# Altium PCB PCB1.PcbDoc (part 2 of 4)
Units mm, origin at the board's own origin, x right, y up, seen from the top; angles counter-clockwise.
Board outline 200 x 55 mm, 4 copper layers (Top Layer, Power Layer, GND Layer, Bottom Layer), stack 1.714 mm thick; 404 components, 268 nets, 1339 pads, 777 vias.
Unrouted connection lines stored in the file: 18.
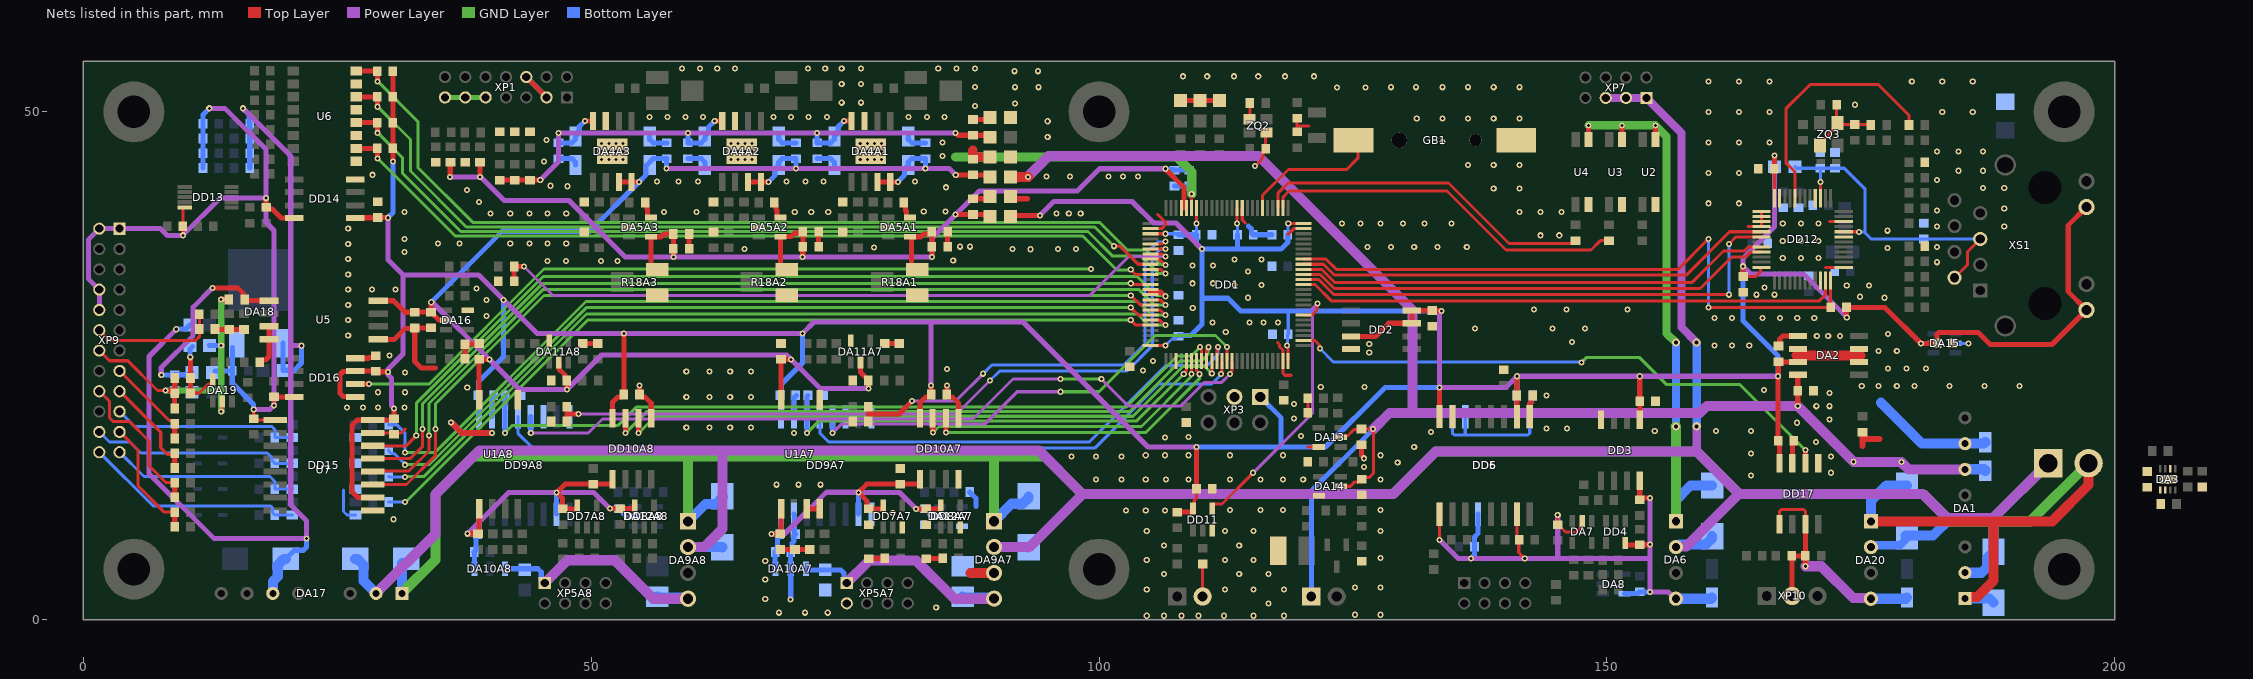
[diagram p4: the nets of this part, all layers, seen from the top]

## Via types
v1: diameter 0.6, hole 0.3, Top Layer to Bottom Layer, tented both sides, 735 vias
v2: diameter 0.6, hole 0.3, Top Layer to Bottom Layer, 36 vias
v3: diameter 0.8, hole 0.4, Top Layer to Bottom Layer, tented both sides, 4 vias
v4: diameter 0.2, hole 0.1, Top Layer to Bottom Layer, 2 vias

## Nets (pads, with @x,y where several pads share a name; then routed paths per layer and width w, separated by ;. In a path a pad name is that pad's centre, name@x,y a point inside that pad or via, vN(x,y) a via of type N, cw(c..) or ccw(c..) an arc to the next point about the centre after c; other vN are vias at no path point) (continued)
+3.3V: C8.1 C11.1 C13.2 C14.2 C15.2 C20.1 C21.1 C27.1 C38.1 C42.1 C43.1 C56A7.1 C56A8.1 C68A7.1 C68A8.1 C77.1 C80.1 C85.1 C90.1 C105.1 C106.1 C108.1 C123.1 DA2.2 DA2.3 DA2.6 DA2.7 DA15.5 DD1.11 DD1.19 DD1.28 DD1.50 DD1.75 DD1.100 DD2.3 DD2.7 DD2.8 DD3.1 DD5.10 DD5.16 DD6.7 DD9A7.1 DD9A8.1 DD10A7.8 DD10A8.8 DD11.5 DD12.24 DD12.36 DD14.1 DD15.10 DD15.16 DD16.1 DD16.3 DD17.8 L2.1 L6.1 R22.1 R56.2 R71.2 R91.1 R92.1 R94.1 R96.1 XP3.1 XS1.9 XS1.11 | length 489
  Top Layer w0.3: DD1.50@105.075,27 v1(106.525,27) ; DD1.28@105.075,38 v1(106.525,38) ; DD11.5@109.125,10.6 109.25,10.725 DD11.5@109.25,10.95 109.375,11.075 109.375,11.75 109.6,11.975 C77.1@109.6,12.9 ; v1(109.6,39.025) DD1.19@109.6,40.525 ; v1(113.6,39.025) DD1.11@113.6,40.525 ; v1(118.5,27) 118.5,26.919 118.6,26.819 DD1.75@118.6,25.475 ; v1(118.625,39) DD1.100@120.125,39 ; C90.1@163.4,33.8 164.644,33.8 165.12,34.276 165.12,34.7 DD12.36@165.2,34.7 ; C85.1@166.475,44.425 C85.1@166.45,44.4 166.5,44.35 DD12.24@166.5,41.5 ; v1@166.475,45.675 v1(166.5,45.7)
  Top Layer w0.5: DD16.1@26.8,21.95 26.75,22 25.593,22 25.3,22.293 25.3,24.157 25.593,24.45 26.75,24.45 DD16.3@26.8,24.5 26.825,24.475 C108.1@28.775,24.475 ; DD14.1@26.8,39.55 26.825,39.575 28.975,39.575 28.987,39.588 30.013,39.588 v1(30.025,39.575) ; DD15.16@28.485,19.685 28.468,19.667 26.992,19.667 26.48,19.155 26.48,12.61 27.04,12.05 DD15.10@28.5,12.05 ; DD15.16@28.5,19.67 30.47,19.67 C106.1@30.6,19.8 v1(30.6,20.8) ; C108.1@28.825,24.425 28.831,24.419 29.981,24.419 v1(30,24.4) ; v1(30.5,45.1) R96.1@30.5,46.4 R92.1@30.5,51.5 R91.1@30.5,54 ; DD10A8.8@52.125,19.85 52.125,21.429 52.646,21.95 53.05,21.95 53.225,22.125 C68A8.1@53.225,22.175 v1(53.225,28.2) ; DD10A7.8@82.375,19.85 82.375,21.369 82.956,21.95 83.3,21.95 83.475,22.125 C68A7.1@83.475,22.175 v1(83.475,23.05) ; L2.1@91.275,39.7 91.376,39.801 v1(94.174,39.801) ; R56.2@107.7,10.6 DD11.5@109.125,10.6 ; C77.1@109.6,12.9 v1(109.6,17) ; DD2.3@124.796,27.896 127.221,27.896 128.521,29.196 DD2.7@130.796,29.196 DD2.8@130.796,30.446 C27.1@132.796,30.446 132.818,30.423 133.702,30.423 v1(133.725,30.4) ; DD5.16@133.506,20.01 v1(133.506,22.85) ; DD5.10@141.126,20.01 C43.1@141.126,21.838 ; C43.1@141.15,21.786 v1(141.15,23.975) ; C38.1@153.225,21.5 v1(153.225,23.975) ; DD3.1@153.231,19.7 C38.1@153.231,21.55 ; C90.1@163.4,33.8 v1(163.4,34.8) ; C85.1@166.475,44.425 v1@166.475,45.675 ; DD17.8@166.989,15.4 166.989,17.486 C123.1@166.85,17.625 v1(166.85,23.975) 166.862,23.987 166.862,25.387 C8.1@166.875,25.4 166.887,25.388 DA2.3@168.788,25.388 ; DA2.3@168.8,25.375 DA2.3@168.788,25.388 ; DA2.3@168.825,25.425 DA2.3@168.788,25.388 ; v1(173.6,29.775) 173.587,29.788 173.587,30.738 R71.2@173.575,30.75 177.35,30.75 v1(180.9,27.2) 182.475,27.2 C80.1@182.5,27.225 182.5,28.124 182.676,28.3 186.512,28.3 187.712,27.1 193.8,27.1 XS1.9@197.2,30.5 195.4,32.3 195.4,38.83 XS1.11@197.2,40.63
  Top Layer w1: 168.675,26.025 168.8,26.025 174.8,26.025 174.926,26.025
  Power Layer w0.5: 30.025,35.432 31.499,33.958 ; 30.025,35.482 v1(30.025,39.575) ; v1(30.6,20.8) 30.6,20.827 30.344,21.083 30.344,23.8 30.019,24.125 30.019,24.381 v1(30,24.4) 30.019,24.419 30.019,24.675 31.499,26.155 31.499,33.958 ; v1(70.825,28.2) v1(53.225,28.2) 44.675,28.2 v1(41.375,31.5) 41.356,31.519 38.917,33.958 31.499,33.958 ; v1@70.844,28.219 71.943,29.318 83.475,29.318 ; v1(83.475,23.05) 83.475,29.318 ; v1(94.174,39.801) 95.55,41.176 103.249,41.176 ; 103.275,41.176 103.249,41.176 ; v1(109.6,17) 104.825,17 92.507,29.318 83.475,29.318 ; v1(110.125,36.5) 107.575,39.05 105.375,39.05 103.249,41.176 ; v1(133.506,22.85) 140.025,22.85 v1@141.131,23.956 ; v1@133.506,22.877 133.506,30.154 133.725,30.373 v1(133.725,30.4) ; v1(141.15,23.975) v1(153.225,23.975) v1(166.85,23.975) ; v1(166.5,45.7) 166.5,38.711 163.4,35.611 v1(163.4,34.8) 164.145,34.055 169.32,34.055 v1(173.6,29.775)
  Bottom Layer w0.3: v1(106.525,27) 107.175,27.65 107.5,27.65 C15.2@107.825,27.975 ; v1(106.525,38) 107.725,38 C14.2@107.825,37.9 ; C11.1@109.575,37.9 109.587,37.912 109.587,39.013 v1(109.6,39.025) ; v1(113.6,39.025) 113.612,39.013 C13.2@113.612,37.9 ; v1(118.5,27) 118.557,27.057 118.557,28.032 C21.1@118.625,28.1 118.625,30.4 ; C20.1@118.575,37.9 118.6,37.925 118.6,38.975 v1(118.625,39) ; L6.1@166.5,44.6 v1(166.5,45.7) ; v1(180.9,27.2) 180.912,27.212 182.137,27.212 DA15.5@182.15,27.225
  Bottom Layer w0.5: v1(30.025,39.575) 30.025,39.602 30.5,40.077 v1(30.5,45.1) ; DD9A8.1@38.99,20.209 38.99,21.967 38.943,22.014 38.943,23.459 41.375,25.891 v1(41.375,31.5) ; C56A7.1@68.64,22.165 68.75,22.275 68.75,23.209 70.825,25.284 v1(70.825,28.2) ; DD9A7.1@68.705,20.2 C56A7.1@68.705,22.1 ; C15.2@107.825,27.975 109.025,27.975 110.125,29.075 110.125,31.654 ; C14.2@107.825,37.9 C11.1@109.575,37.9 109.575,37.05 v1(110.125,36.5) ; v1(109.6,17) 117.925,17 ; C13.2@113.625,37.9 113.625,36.5 ; XP3.1@115.865,21.94 117.925,19.88 117.925,17 ; C20.1@118.575,37.9 118.575,37.15 117.925,36.5 113.625,36.5 ; v1(133.506,22.85) 128.15,22.85 122.3,17 117.925,17 ; v1(133.725,30.4) 118.625,30.4 113.95,30.4 112.696,31.654 110.125,31.654 ; DD6.7@141.108,20.01 C42.1@141.108,22.052 ; C42.1@141.15,21.868 v1(141.15,23.975) ; v1(163.4,34.8) 163.4,29.425 166.85,25.975 v1(166.85,23.975) ; 110.125,31.654 v1(110.125,36.5) ; v1(110.125,36.5) 113.625,36.5
+3.3VA: C10.1 C12.2 C17.2 C35A1.1 C35A2.1 C35A3.1 C36A1.1 C36A2.1 C36A3.1 DA5A1.4 DA5A2.4 DA5A3.4 DD1.21 DD1.22 L2.2 R18A1.3 R18A2.3 R18A3.3 R19A4.1 R19A5.1 | length 116.3
  Top Layer w0.3: DD1.22@108.1,40.525 108.35,40.525 DD1.21@108.6,40.525
  Top Layer w0.5: v1(36.125,43.593) 36.144,43.612 36.144,44.994 R19A5.1@36.175,45.025 ; v1(39.073,43.59) R19A4.1@39.073,45.018 ; R18A3.3@56.525,34.475 56.3,34.475 55.9,34.875 DA5A3.4@55.9,37.7 56.892,37.7 57.172,37.98 C35A3.1@58.1,37.98 ; v1@58.1,35.895 C36A3.1@58.1,36.525 ; C36A3.1@58.1,36.33 C35A3.1@58.1,37.7 ; DA5A2.4@68.65,37.7 68.65,34.775 R18A2.3@68.95,34.475 ; DA5A2.4@68.8,37.7 68.825,37.725 69.717,37.725 70.043,38.051 70.696,38.051 C35A2.1@70.85,38.205 C36A2.1@70.85,36.705 70.838,36.692 70.838,35.713 v1(70.825,35.7) ; R18A1.3@82.1,34.475 81.95,34.475 81.55,34.875 81.55,37.7 81.554,37.704 82.482,37.704 82.757,37.98 83.375,37.98 83.55,38.155 C35A1.1@83.55,38.205 ; v1(83.55,35.7) C36A1.1@83.55,36.705 C35A1.1@83.55,37.98 ; v1(85.875,39.9) C10.1@87.6,39.9 ; C10.1@87.625,39.9 89.075,39.9 L2.2@89.275,39.7 ; v1@106.544,44.381 108.35,42.575 108.35,40.525
  Power Layer w0.5: v1(36.125,43.593) v1@39.119,43.593 ; v1@39.146,43.593 v1@39.119,43.593 ; v1(106.525,44.4) 100.05,44.4 97.875,42.225 88.225,42.225 83.55,37.55 v1(83.55,35.7) v1(70.825,35.7) v1(58.1,35.7) 53.399,35.7 47.824,41.275 41.463,41.275 39.167,43.571 39.119,43.571 v1@39.119,43.593
  Bottom Layer w0.5: v1@36.125,43.566 v1(36.125,43.593) ; v1(106.525,44.4) 106.582,44.343 107.332,44.343 C17.2@107.425,44.25 ; C17.2@107.433,44.258 C12.2@108.841,44.258
+3.3VA_ETH: C78.1 C89.1 C92.1 DD12.8 DD12.15 L6.2 XS1.2 XS1.5 | length 33.6
  Top Layer w0.3: DD12.15@171,41.5 v1(171,43.1) ; DD12.8@173.3,38.2 174.797,38.2 v1(174.816,38.182) ; XS1.2@184.2,33.677 185.5,34.977 185.5,36.247 XS1.5@186.74,37.487
  Bottom Layer w0.3: L6.2@168.5,44.6 168.65,44.45 C89.1@170.975,44.45 ; v1(171,43.1) 171,44.425 C89.1@170.975,44.45 ; v1(174.816,38.182) 175.382,38.182 ; XS1.5@186.74,37.487 C78.1@181.179,37.487 176.013,37.487 175.382,38.118 175.382,42.433 173.365,44.45 C92.1@172.442,44.45 C89.1@170.975,44.45
+5V: C2.1 C4.2 C5.1 C73.1 C74.1 DA1.6 DA2.4 DA3.1 DA3.6 DA13.2 DA14.2 L1.1 XP6.1 | length 155.5
  Top Layer w0.3: DA13.2@123.937,18.085 123.941,18.088 124.46,18.088 125.088,18.716 125.764,18.716 C73.1@125.837,18.788 125.849,18.776 126.974,18.776 v1(126.987,18.763) ; DA14.2@123.95,13.15 124.755,13.15 125.184,13.579 125.579,13.579 C74.1@125.85,13.85 ; C74.1@125.85,13.9 125.85,14.007 126.607,14.007 127,14.4 v1@127,18.763 ; C4.2@168.775,22.55 168.775,24.1 DA2.4@168.8,24.125
  Top Layer w0.5: v1(168.775,21.05) DA2.4@168.775,24.1
  Top Layer w1: L1.1@91.275,43.6 v1(93,43.6)
  Power Layer w1: v1(93,43.6) 95.058,45.658 115.692,45.658 130.85,30.5 130.85,20.35 ; v1@126.993,18.757 128.587,20.35 130.85,20.35 ; v1(174.27,15.56) 168.78,21.05 159.83,21.05 159.13,20.35 130.85,20.35 ; v1@174.305,15.525 v1(178.975,15.525) 179.7,14.8 DA1.6@185.169,14.8
  Bottom Layer w0.5: XP6.1@120.896,2.3 120.896,12.673 v1(126.987,18.763)
  Bottom Layer w1: DA1.6@185.25,14.82 187.125,14.82 187.225,14.72 C2.1@187.225,14.675
+5V_DRVA7: C54A7.1 C58A7.1 C59A7.1 C63A7.1 C64A7.1 C67A7.1 C70A7.1 DA10A7.1 DA12A7.2 DD7A7.5 DD8A7.5 DD9A7.10 DD9A7.16 DD10A7.1 U1A7.1 | length 44
  Top Layer w0.5: v1(67.775,8.45) 67.787,8.463 68.587,8.463 C54A7.1@68.6,8.475 ; C54A7.1@68.625,8.475 68.7,8.55 U1A7.1@68.7,10.925 ; v1(76.325,12.538) 77.137,13.35 C63A7.1@80.425,13.35 82.325,13.35 82.375,13.4 DD10A7.1@82.375,13.85 ; v1@76.344,12.519 77.151,11.712 77.151,11.099 C58A7.1@77.325,10.925 ; C58A7.1@77.55,10.925 78.725,10.925 78.75,10.95 DD7A7.5@78.75,11.25 ; v1(81.975,10.925) C59A7.1@83,10.925 84.4,10.925 84.425,10.95 DD8A7.5@84.425,11.25
  Power Layer w0.5: v1(67.775,8.45) 69.05,8.45 73.157,12.557 v1@76.279,12.557 ; v1(76.325,12.538) 80.362,12.538 v1(81.975,10.925)
  Bottom Layer w0.3: C70A7.1@83,10.925 83.196,10.729 83.196,10.351 83.372,10.175 DA12A7.2@84.475,10.175
  Bottom Layer w0.5: v1(67.775,8.45) 67.787,8.438 68.562,8.438 C64A7.1@68.575,8.425 ; C67A7.1@68.12,6.62 68.12,5.028 DA10A7.1@68.145,5.003 ; C67A7.1@68.125,6.675 68.3,6.85 68.3,7.157 68.336,7.193 68.336,7.907 68.4,7.971 C64A7.1@68.4,8.2 ; C64A7.1@68.705,8.505 DD9A7.16@68.705,10.6 ; DD9A7.10@76.325,10.4 76.325,12.199 ; v1(81.975,10.925) C70A7.1@83,10.925
+5V_DRVA8: C54A8.1 C58A8.1 C59A8.1 C63A8.1 C64A8.1 C67A8.1 C70A8.1 DA10A8.1 DA12A8.2 DD7A8.5 DD8A8.5 DD9A8.10 DD9A8.16 DD10A8.1 U1A8.1 | length 44.2
  Top Layer w0.5: v1(37.835,8.475) C54A8.1@38.875,8.475 38.985,8.585 U1A8.1@38.985,10.925 ; DD7A8.5@48.65,11.25 48.65,10.95 48.625,10.925 47.175,10.925 47.175,11.978 v1(46.615,12.538) 47.426,13.35 C63A8.1@50.225,13.35 52.075,13.35 52.125,13.4 DD10A8.1@52.125,13.85 ; v1(51.85,10.95) C59A8.1@52.875,10.95 54.275,10.95 54.3,10.975 DD8A8.5@54.3,11.25
  Power Layer w0.5: v1(37.835,8.475) 41.898,12.538 v1(46.615,12.538) 50.262,12.538 v1(51.85,10.95)
  Bottom Layer w0.3: C70A8.1@52.725,10.95 52.775,10.95 53.05,10.675 53.05,10.45 53.325,10.175 DA12A8.2@54.35,10.175
  Bottom Layer w0.5: v1(37.835,8.475) 38.915,8.475 38.99,8.55 DD9A8.16@38.99,10.4 ; C67A8.1@38.5,6.675 38.675,6.85 38.675,7.193 38.675,8.25 C64A8.1@38.85,8.425 ; DA10A8.1@38.525,5.025 C67A8.1@38.525,6.65 ; DD9A8.10@46.61,10.4 46.612,10.402 46.612,12.536 v1(46.615,12.538) ; v1(51.85,10.95) C70A8.1@52.725,10.95
+5V_FS: C120.1 C121.1 C122.1 DA20.4 DD17.1 DD17.3 XP10.2 | length 26.2
  Top Layer w0.3: DD17.1@166.989,9.4 166.99,10.685 167.166,10.861 169.363,10.861 169.539,10.685 DD17.3@169.539,9.4
  Top Layer w0.5: XP10.2@168.225,2.35 168.2,2.375 168.2,6.275 C120.1@168.175,6.3 C121.1@169.525,6.3 ; C121.1@169.539,6.311 DD17.3@169.539,9.4
  Top Layer w0.6: v1(169.525,5.275) 169.525,6.297 C121.1@169.539,6.311
  Power Layer w1: v1(169.525,5.275) 171.1,5.275 174.223,2.152 175.898,2.152 DA20.4@175.975,2.075
  Bottom Layer w0.6: DA20.4@175.899,2.151 DA20.4@175.975,2.075
  Bottom Layer w1: DA20.4@175.975,2.075 179.4,2.075 C122.1@179.525,2.2
+5V_HW: C95.1 C100.1 C101.1 C112.1 C113.1 DA18.3 DD13.10 DD14.8 DD15.1 DD16.8 L7.1 R109.2 R110.2 R111.2 R112.2 XP9.1 XP9.2 XP9.8 XP9.10 | length 89.2
  Top Layer w0.3: v1(9.825,37.85) C95.1@9.825,38.75 9.825,40.55 9.875,40.6 DD13.10@10,40.6 ; C101.1@16.8,19.8 v1(16.8,20.7) ; C101.1@17.1,19.695 17.125,19.67 DD15.1@18.8,19.67 ; v1(18.8,21.1) C112.1@18.8,21.95
  Top Layer w0.5: v1(18,41.5) 18.013,41.487 18.013,40.612 C100.1@18.025,40.6 18.2,40.425 18.637,40.425 19.525,39.536 20.786,39.536 DD14.8@20.8,39.55 ; C112.1@18.8,21.95 DD16.8@20.8,21.95
  Power Layer w0.5: XP9.10@1.6,30.5 XP9.8@1.6,32.5 0.518,33.582 0.518,37.418 XP9.2@1.6,38.5 XP9.1@3.6,38.5 7.625,38.5 8.294,37.831 v1@9.779,37.831 ; v1(9.825,37.85) 13.475,41.5 v1(18,41.5) ; v1(12.425,50.35) 13.956,50.35 18,46.306 v1(18,41.5) ; v1(16.8,20.7) 18.373,20.7 18.773,21.1 v1(18.8,21.1) ; v1@18.8,21.127 18.8,38.325 18,39.125 v1(18,41.5)
  Bottom Layer w0.5: R109.2@11.809,44.475 R110.2@11.809,45.925 R112.2@11.809,48.825 ; R112.2@11.825,48.8 11.825,49.75 v1(12.425,50.35) ; L7.1@13,24.5 C113.1@14.7,24.5 ; DA18.3@14.7,26.804 C113.1@14.7,24.5 ; v1@16.767,20.733 16.781,20.746 16.781,21.194 14.7,23.275 C113.1@14.7,24.5
+5V_PS: C40.1 C41.1 C45.1 C46.1 C47.1 C48.1 C49.1 DA6.4 DA7.2 DA8.5 DD3.8 DD4.5 DD5.1 DD5.7 DD6.13 | length 66
  Top Layer w0.3: v1@133.456,7.875 v1(133.506,7.875) DD5.1@133.506,10.41 ; DD5.7@141.126,10.41 141.126,8.13 C47.1@141.356,7.9 ; C47.1@141.356,7.875 141.313,7.875 141.313,6.619 v1(141.906,6.025) ; v1(145.15,10.325) C46.1@145.15,9.375 145.2,9.375 145.925,8.65 146.164,8.65 ; 146.114,8.65 146.164,8.65 ; DA7.2@147.55,9.725 147.425,9.6 147.425,9.051 147.024,8.65 146.164,8.65
  Top Layer w0.5: DD4.5@151.8,7.575 151.8,7.4 151.825,7.375 C45.1@153.225,7.375 153.238,7.388 154.237,7.388 v1(154.25,7.4) ; C40.1@153.225,11.85 C40.1@153.225,11.975 ; DD3.8@153.225,13.7 C40.1@153.225,11.975 ; v1(154.25,11.975) C40.1@153.225,11.975
  Power Layer w0.5: v1(133.506,7.875) 135.356,6.025 v1(136.606,6.025) v1(141.906,6.025) 145.15,6.025 ; v1@145.15,10.298 145.15,6.025 ; v1(154.25,11.975) v1(154.25,7.4) 154.25,6.025 ; DA6.4@156.781,2.08 156.709,2.08 156.039,2.75 v1(154.25,2.75) 154.25,6.025 ; 145.15,6.025 154.25,6.025
  Bottom Layer w0.5: v1(136.606,6.025) 136.956,6.375 C48.1@136.956,7.2 136.956,8.15 137.316,8.51 DD6.13@137.316,10.4 DD6.13@137.316,10.41 ; DA8.5@151.725,2.575 153,2.575 153.175,2.75 C49.1@153.225,2.75 v1(154.25,2.75)
  Bottom Layer w1: DA6.4@156.781,2.08 160.25,2.08 160.35,2.18 C41.1@160.35,2.2
+5VA: C3.1 C31A1.1 C31A2.1 C31A3.1 C32A1.1 C32A2.1 C32A3.1 C60A7.1 C60A8.1 C65A7.1 C65A8.1 C102.1 C104.1 DA4A1.7 DA4A1.8 DA4A2.7 DA4A2.8 DA4A3.7 DA4A3.8 DA11A7.2 DA11A8.2 DA16.2 L1.2 U1A7.8 U1A8.8 U5.8 | length 152.2
  Top Layer w0.5: U5.8@29.05,31.425 29.067,31.408 30.567,31.408 31.7,30.275 C102.1@32.65,30.275 32.654,30.279 34.246,30.279 C104.1@34.25,30.282 ; C104.1@34.263,30.295 34.263,31.245 v1(34.275,31.257) ; C104.1@34.3,30.282 34.475,30.107 34.475,30.057 35,29.532 35.7,29.532 DA16.2@35.725,29.507 ; U1A8.8@38.985,21.675 C60A8.1@38.985,25.625 ; C60A8.1@38.998,25.638 39.004,25.631 39.994,25.631 v1(40,25.625) ; DA11A8.2@46.825,25.325 46.85,25.3 46.85,24.675 47.45,24.075 47.45,23.725 C65A8.1@47.625,23.55 v1(47.625,22.675) ; DA4A3.7@52.75,43.105 DA4A3.8@54,43.105 54.005,43.1 v1(54.725,43.1) ; DA4A2.7@65.466,43.105 65.471,43.1 v1(67.475,43.1) ; U1A7.8@68.7,21.675 68.7,25.6 68.75,25.65 68.762,25.638 69.688,25.638 v1(69.7,25.625) ; DA11A7.2@76.525,25.325 76.525,24.375 C65A7.1@77.262,23.638 ; v1(77.3,22.775) C65A7.1@77.3,23.55 ; DA4A1.7@78.2,43.105 78.205,43.1 v1(80.2,43.1) ; v1(85.9,43.8) 89.075,43.8 L1.2@89.275,43.6
  Power Layer w0.5: v1(34.275,31.257) 34.294,31.238 34.387,31.238 v1@39.981,25.644 ; v1(40,25.625) 42.95,22.675 v1(47.625,22.675) 51.025,26.075 69.25,26.075 v1(69.7,25.625) 72.55,22.775 v1@77.273,22.775 ; v1@57.675,44.425 v1(70.175,44.425) 85.248,44.425 85.873,43.8 v1(85.9,43.8)
  Bottom Layer w0.5: v1(34.275,31.257) 41.262,38.244 49.869,38.244 v1(54.725,43.1) 55.425,43.8 55.425,44.7 56.125,45.4 C31A3.1@57.45,45.4 57.437,45.387 57.437,44.438 v1(57.425,44.425) ; v1@67.494,43.119 68.125,43.75 68.125,44.425 C32A2.1@68.475,44.775 68.475,45.05 68.825,45.4 C31A2.1@70.175,45.4 v1(70.175,44.425) ; v1@80.219,43.119 80.875,43.775 80.875,44.425 C32A1.1@81.225,44.775 81.225,45.05 81.575,45.4 C31A1.1@82.925,45.4 82.912,45.387 82.912,44.438 v1(82.9,44.425)
+5VA_HW: C97.1 C117.1 L7.2 U5.1 | length 20.1
  Top Layer w0.5: v1(12.75,32.675) 15.233,32.675 15.725,32.183 15.725,31.7 16,31.425 U5.1@18.3,31.425
  Power Layer w0.5: v1(7.7,24.1) 7.7,24.832 10.841,27.973 10.841,30.766 v1(12.75,32.675)
  Bottom Layer w0.5: v1(7.7,24.1) 7.703,24.097 C117.1@9.032,24.097 ; C117.1@9.032,24.12 10.512,24.12 L7.2@10.717,24.325
+12V_DRVA7: C57A7.1 C62A7.2 DA9A7.4 DA10A7.3 XP5A7.1 | length 25.2
  Top Layer w1: DA9A7.4@89.665,2.075 DA9A7.4@89.675,2.085
  Power Layer w1: XP5A7.1@75.185,3.653 77.357,5.825 82.023,5.825 85.773,2.075 DA9A7.4@89.7,2.075
  Bottom Layer w0.5: DA10A7.3@71.145,5.003 71.145,4.947 71.18,4.912 C62A7.2@73.045,4.912 ; C62A7.2@73.053,4.903 74.589,4.903 74.882,4.611 74.882,3.956 XP5A7.1@75.185,3.653
  Bottom Layer w1: C57A7.1@86.575,2.275 86.675,2.175 89.6,2.175 DA9A7.4@89.7,2.075
+12V_DRVA8: C57A8.1 C62A8.2 DA9A8.4 DA10A8.3 XP5A8.1 | length 24.6
  Power Layer w1: XP5A8.1@45.45,3.625 47.688,5.863 52.336,5.863 56.125,2.075 DA9A8.4@59.55,2.075
  Bottom Layer w0.5: DA10A8.3@41.525,5.025 44.758,5.025 45.1,4.683 45.1,3.975 XP5A8.1@45.45,3.625
  Bottom Layer w1: C57A8.1@56.525,2.275 56.625,2.175 59.45,2.175 DA9A8.4@59.55,2.075
+24V: C1.1 C39.1 C51A7.1 C51A8.1 C110.1 C119.1 DA1.2 DA6.2 DA9A7.2 DA9A8.2 DA17.2 DA20.2 XP2.1 XP7.1 XP7.3 XP7.5 | length 296.9
  Power Layer w0.8: XP7.5@149.875,51.375 XP7.3@151.875,51.375 XP7.1@153.875,51.375 157.324,47.926 157.324,28.801 v3(158.825,27.3) ; 158.831,16.569 v3(158.831,19.05)
  Power Layer w1: DA17.2@28.84,2.6 34.675,8.435 34.675,12.333 39.025,16.683 62.925,16.683 ; DA9A8.2@59.55,7.155 61.155,7.155 62.925,8.925 62.925,16.683 ; DA9A7.2@89.7,7.155 93.157,7.155 98.376,12.374 ; DA6.2@156.781,7.16 156.848,7.226 157.826,7.226 163,12.4 ; XP2.1@193.44,15.425 188.05,10.035 183.432,10.035 181.067,12.4 163,12.4 ; 62.925,16.683 94.067,16.683 98.376,12.374 ; 98.376,12.374 128.939,12.374 133.134,16.569 158.831,16.569 163,12.4
  Bottom Layer w0.8: v3(158.831,19.05) v3@158.831,27.3 ; DA20.2@175.975,7.155 176.09,7.27 176.514,7.27 176.582,7.337 178.825,7.337 179.525,8.037 C119.1@179.525,8.225
  Bottom Layer w1: C110.1@26.8,6 27,6 27.6,5.4 27.6,3.84 DA17.2@28.783,2.657 ; DA9A8.2@59.55,7.155 59.552,7.153 62.923,7.153 C51A8.1@62.925,7.15 ; DA9A7.2@89.675,7.165 89.682,7.158 93.067,7.158 C51A7.1@93.075,7.15 ; DA6.2@156.781,7.16 156.89,7.16 157.15,7.42 159.164,7.42 159.169,7.425 159.75,7.425 160.35,8.025 C39.1@160.35,8.225 ; C119.1@179.395,8.295 182.095,8.295 183.835,10.035 188.05,10.035 ; DA1.2@185.25,4.64 186.864,4.64 187.45,5.226 187.45,6.1 C1.1@188.05,6.7 188.05,10.035 ; XP2.1@193.44,15.425 188.05,10.035
+24V_HW: C111.2 C114.1 DA17.6 DA18.1 L8.1 R105.2 R106.2 R107.2 R108.2 | length 101.1
  Power Layer w0.5: v1(9.175,28.6) 6.5,25.925 6.5,14.391 12.903,7.988 v1(22,7.988) 22,9.741 20.442,11.298 20.442,26.994 ; v1(15.75,50.35) 20.442,45.658 20.442,26.994 ; v1@21.481,26.994 20.442,26.994
  Bottom Layer w0.5: v1(9.175,28.6) 9.202,28.6 9.232,28.63 10.133,28.63 L8.1@10.518,29.015 ; v1(15.75,50.35) 15.75,50.323 16.348,49.725 16.348,48.886 R108.2@16.409,48.825 ; R105.2@16.409,44.475 R106.2@16.409,45.925 R107.2@16.409,47.375 R108.2@16.409,48.825 ; R108.2@16.409,48.875 R108.2@16.409,48.825 ; DA18.1@19.7,27.229 C111.2@19.7,24.535 19.732,24.567 20.792,24.567 21.5,25.275 v1(21.5,26.975) ; C114.1@19.959,6 20.804,6.845 21.707,6.845 22,7.138 v1(22,7.988)
  Bottom Layer w1: DA17.6@18.68,2.6 18.68,3.78 19.169,4.269 19.169,5.4 19.769,6 C114.1@19.959,6
+24VA_HW: C116.1 C118.1 DA19.5 L8.2 | length 7.7
  Top Layer w0.3: v1(10.55,25.85) v1@10.558,25.842 ; C116.1@10.575,22.3 C116.1@10.575,22.3 11.408,22.3 12.308,23.2 12.633,23.2 12.758,23.325 DA19.5@12.758,23.65
  Top Layer w0.5: C118.1@10.558,23.823 v1@10.558,25.842 ; C116.1@10.575,22.3 C118.1@10.574,23.864
  Bottom Layer w0.5: v1(10.55,25.85) 10.534,25.866 10.534,26.67 L8.2@10.753,26.888
+VBAT: DD1.6 GB1.2 | length 13.9
  Top Layer w0.3: DD1.6@116.1,40.525 116.1,41.777 118.648,44.325 124.375,44.325 125.475,45.425 GB1.2@125.475,47.2
-5VA: C18.1 C29A1.2 C29A2.2 C29A3.2 C30A1.1 C30A2.1 C30A3.1 DA4A1.4 DA4A2.4 DA4A3.4 L3.2 R12A1.1 R12A2.1 R12A3.1 | length 69.2
  Top Layer w0.5: R12A1.1@41,43.3 42.525,43.3 44.05,43.3 v1(45,43.3) ; v1(49.425,49.1) 50.195,49.1 DA4A3.4@50.2,49.105 ; v1(62.175,49.1) 62.911,49.1 DA4A2.4@62.916,49.105 ; v1(74.9,49.1) 75.645,49.1 DA4A1.4@75.65,49.105 ; v1(85.875,47.925) 85.902,47.925 86.127,47.7 89.1,47.7 L3.2@89.25,47.55
  Power Layer w0.5: v1(45,43.3) 46.8,45.1 v1(46.8,47.925) v1(59.525,47.925) v1(72.25,47.925) ; v1@72.277,47.925 v1(85.875,47.925)
  Bottom Layer w0.5: v1(46.8,47.925) C30A3.1@46.8,46.95 48.125,46.95 48.475,47.3 C29A3.2@48.475,47.575 48.825,47.925 48.825,48.531 49.375,49.081 49.406,49.081 v1(49.425,49.1) ; v1(59.525,47.925) C30A2.1@59.525,46.95 60.85,46.95 61.2,47.3 C29A2.2@61.2,47.575 61.55,47.925 61.55,48.475 v1@62.156,49.081 ; v1(72.25,47.925) C30A1.1@72.25,46.95 73.6,46.95 73.95,47.3 C29A1.2@73.95,47.575 74.3,47.925 74.3,48.5 v1@74.881,49.081
ACTn: DD12.20 R63.2 | length 24.5
  Top Layer w0.3: DD12.20@168.5,41.5 168.5,44.1 167.6,45 167.6,50.3 170,52.7 176.7,52.7 179.725,49.675 R63.2@179.725,48.712
AGND: C3.2 C10.2 C12.1 C17.1 C18.2 C29A1.1 C29A2.1 C29A3.1 C30A1.2 C30A2.2 C30A3.2 C31A1.2 C31A2.2 C31A3.2 C32A1.2 C32A2.2 C32A3.2 C33A1.2 C33A2.2 C33A3.2 C34A1.2 C34A2.2 C34A3.2 C35A1.2 C35A2.2 C35A3.2 C36A1.2 C36A2.2 C36A3.2 C37A4.2 C37A5.2 C60A7.2 C60A8.2 C61A7.2 C61A8.2 C65A7.2 C65A8.2 C71A7.2 C71A8.2 C102.2 C103.2 C104.2 C109.2 DA4A1.3 DA4A1.EPAD DA4A2.3 DA4A2.EPAD DA4A3.3 DA4A3.EPAD DA5A1.2 DA5A1.6 DA5A2.2 DA5A2.6 DA5A3.2 DA5A3.6 DA11A7.5 DA11A8.5 DA16.5 DD1.20 R1.2 R2.2 R5.2 R13A1.2 R13A2.2 R13A3.2 R15A1.2 R15A2.2 R15A3.2 R18A1.1 R18A2.1 R18A3.1 R40A7.2 R40A8.2 R97.2 U1A7.5 U1A8.5 U5.5 XP1.3 XP1.6 XP1.9 XP1.11 XP1.13 | length 92
  Top Layer w0.3: DD1.20@109.1,40.525 109.1,41.875 v1(109.125,41.9)
  Top Layer w0.5: U5.5@29.05,27.6 30.625,27.6 31.72,28.695 32.62,28.695 C102.2@32.65,28.725 ; C104.2@34.25,28.725 C102.2@32.65,28.725 ; 34.666,24.8 33.275,24.8 32.65,25.425 C102.2@32.65,28.725 ; C103.2@37.604,25.679 C103.2@37.6,25.682 R97.2@37.6,27.132 37.628,27.16 38.963,27.16 C60A8.2@38.994,27.191 ; XP1.6@43.625,53.425 XP1.3@45.625,51.425 ; R40A8.2@49.2,27.2 C61A8.2@50.65,27.2 ; C34A3.2@55.325,41.025 55.5,40.85 55.5,40.425 55.55,40.375 55.55,39.625 55.575,39.6 DA5A3.6@55.9,39.6 ; C36A3.2@59.65,36.525 C35A3.2@59.65,37.98 ; C34A2.2@68.05,41.075 68.225,40.9 68.225,40.425 68.325,40.325 68.325,39.625 68.35,39.6 DA5A2.6@68.65,39.6 ; C36A2.2@72.4,36.705 C35A2.2@72.4,38.205 ; R40A7.2@78.9,27.2 C61A7.2@80.35,27.2 ; C34A1.2@80.775,41.075 80.95,40.9 80.95,40.297 81.05,40.197 81.05,39.625 81.075,39.6 DA5A1.6@81.4,39.6 ; C36A1.2@85.1,36.705 C35A1.2@85.1,38.205 ; C18.2@87.6,49.25 89.075,49.25 R5.2@89.275,49.45 ; C10.2@87.625,41.45 89.075,41.45 R2.2@89.275,41.65
  Top Layer w0.9: 87.6,46.225 87.575,46.2 87.575,45.55 R1.2@89.275,45.55
  GND Layer w0.5: XP1.13@35.625,51.425 XP1.11@37.625,51.425 XP1.9@39.625,51.425 ; XP1.6@43.625,53.425 XP1.3@45.625,51.425
  GND Layer w0.9: 85.899,45.555 107.659,45.555 109.125,44.09 v1(109.125,41.9)
  Bottom Layer w0.5: XP1.13@35.625,51.425 XP1.11@37.625,51.425 XP1.9@39.625,51.425 ; XP1.6@43.625,53.425 XP1.3@45.625,51.425 ; C30A3.2@46.8,45.4 48.125,45.4 48.475,45.05 C29A3.1@48.475,44.775 ; C32A3.2@55.775,47.575 55.775,47.3 56.125,46.95 C31A3.2@57.45,46.95 ; C30A2.2@59.525,45.4 60.85,45.4 61.2,45.05 C29A2.1@61.2,44.775 ; C32A2.2@68.475,47.575 68.475,47.3 68.825,46.95 C31A2.2@70.175,46.95 ; C30A1.2@72.25,45.4 73.6,45.4 73.95,45.05 C29A1.1@73.95,44.775 ; C32A1.2@81.225,47.575 81.225,47.3 81.575,46.95 C31A1.2@82.925,46.95 ; C17.1@107.425,42.7 107.429,42.704 108.887,42.704 C12.1@108.891,42.708 108.931,42.708 109.106,42.533 109.106,41.918 v1@109.124,41.9
  other v1: 39.7,29.925 39.7,31.475 38.725,32.6 45.725,35.3 47.55,35.3 50.975,35.3 52.625,35.3 85.65,35.35 65.125,36.5 77.85,36.65 86.325,36.725 87.3,36.725 34.95,37.05 37.05,37.05 42.05,37.05 43.925,37.05 45.725,37.05 47.559,37.05 40.1,40 42.05,40 43.925,40 45.725,40 47.559,40 57.2,40.125 60.375,40.125 70.05,40.125 71.675,40.125 73.35,40.125 82.75,40.175 84.875,40.175 38.975,41.125 37.8,42.3 84.95,42.575 47.675,42.675 46.025,42.725 56.5,43.125 58.625,43.125 60.525,43.125 69.225,43.125 71.1,43.125 72.9,43.125 81.9,43.125 45.375,45.1 84.6,45.65 84.6,47 45.6,47.225 55.75,49.475 57.525,49.475 59.3,49.475 61.025,49.475 67.975,49.475 69.675,49.475 71.4,49.475 73.225,49.475 81.25,49.475 83.075,49.475 84.775,49.475 87.775,50.575 74.675,50.9 76.575,50.9 87.775,52.45 74.675,52.75 76.575,52.75 58.95,54.25 60.725,54.25 62.425,54.25 64.175,54.25 71.375,54.25 73.05,54.25 84.175,54.25 85.975,54.25 87.775,54.25 74.675,54.275 76.575,54.275
  other v2: 51.05,45.305 51.75,45.305 52.45,45.305 53.15,45.305 63.766,45.305 64.466,45.305 65.166,45.305 65.866,45.305 76.5,45.305 77.2,45.305 77.9,45.305 78.6,45.305 51.05,46.105 51.75,46.105 52.45,46.105 53.15,46.105 63.766,46.105 64.466,46.105 65.166,46.105 65.866,46.105 76.5,46.105 77.2,46.105 77.9,46.105 78.6,46.105 51.05,46.905 51.75,46.905 52.45,46.905 53.15,46.905 63.766,46.905 64.466,46.905 65.166,46.905 65.866,46.905 76.5,46.905 77.2,46.905 77.9,46.905 78.6,46.905
AGND_HW: C97.2 C98.1 C115.2 C116.2 C117.2 C118.2 DA19.2 R74.2 R81.2 R113.2 R114.1 R115.2 U5.3 U5.4 XP9.14 | length 42.1
  Top Layer w0.3: XP9.14@1.6,26.5 2.6,25.5 4.4,25.5 7.325,22.575 v1(8.1,22.575) ; C116.2@9.024,22.426 C116.2@9.025,22.3 C116.2@9.025,22.3 ; v1(13.6,20.525) 13.654,20.579 13.654,21.446 DA19.2@13.708,21.5
  Top Layer w0.5: v1(8.1,22.575) 8.875,22.575 C116.2@9.024,22.426 ; C115.2@9,20.802 C116.2@9,22.275 ; C118.2@9.024,23.864 C116.2@9.024,22.426 ; C116.2@9.152,22.298 C116.2@9.024,22.426 ; R74.2@12.991,28.625 13.041,28.575 R81.2@14.391,28.575 C98.1@15.841,28.575 ; R114.1@17.408,25.345 17.408,25.395 17.583,25.57 17.948,25.57 18.3,25.921 U5.4@18.3,27.6 U5.3@18.3,28.875 U5.3@17.668,28.875
  Top Layer w0.6: v1(13.6,31.525) C97.2@14.35,31.525
  GND Layer w0.6: v1(8.1,22.575) 13.6,22.575 ; v1(13.6,20.525) 13.6,22.575 ; v1(13.6,31.525) v1(13.6,27) 13.6,22.575
  Bottom Layer w0.3: R115.2@12.438,27.015 R115.2@12.453,27
  Bottom Layer w0.5: v1(8.1,22.575) 10.542,22.575 R113.2@10.717,22.4 ; R115.2@12.453,27 12.46,27.008 13.592,27.008 v1(13.6,27)
AN_MOD_HW: R74.1 R77.2 XP9.12 | length 12.6
  Top Layer w0.3: XP9.12@1.6,28.5 2.6,27.5 11.076,27.5 11.441,27.865 R74.1@11.441,28.625 ; R74.1@11.441,28.599 R77.2@11.441,30.075
COM1_HW: R76.2 R83.1 XP9.17 | length 10.4
  Top Layer w0.3: XP9.17@3.6,22.5 7.648,18.452 7.648,16.952 8.3,16.3 R76.2@9.025,16.3
  Top Layer w0.5: R83.1@9.025,14.8 R76.2@9.025,16.3
COM2_HW: R79.2 R90.1 XP9.18 | length 15
  Top Layer w0.3: XP9.18@1.6,22.5 2.6,21.5 2.6,19.9 3,19.5 4.6,19.5 6.5,17.6 6.5,15.169 8.169,13.5 R79.2@9.025,13.5
  Top Layer w0.5: R90.1@9.025,12.05 R79.2@9.025,13.5
COM3_HW: R82.2 R84.1 XP9.21 | length 12.2
  Top Layer w0.3: XP9.21@3.6,18.5 5.4,16.7 5.4,13.2 8,10.6 R82.2@9.025,10.6
  Top Layer w0.5: R84.1@9.025,9.15 R82.2@9.025,10.6
CRASH_IND: DD1.3 R54.2 | length 33.8
  Top Layer w0.3: DD1.3@117.6,40.525 117.6,41.975 118.625,43 134.4,43 140.35,37.05 146.625,37.05 R54.2@146.9,37.325
DIG_MOD_HW: R73.2 R89.1 XP9.15 | length 9.1
  Top Layer w0.3: XP9.15@3.6,24.5 8.475,19.625 8.75,19.625 9.025,19.35 R73.2@9.025,19.3
  Top Layer w0.5: R89.1@9.025,17.8 R73.2@9.025,19.3
DRV1_AN_MOD: DD1.63 DD9A7.5 | length 46.2
  Top Layer w0.3: DD1.63@112.6,25.475 v1(112.6,26.85)
  Power Layer w0.3: v1(73.775,18.4) 73.784,18.4 74.639,19.254 88.754,19.254 91.95,22.45 v1(96.2,22.45)
  GND Layer w0.3: v1(96.2,22.45) 100,22.45 105.533,27.983 111.467,27.983 v1(112.6,26.85)
  Bottom Layer w0.5: v1(73.775,18.4) 73.78,18.405 73.78,19.995 DD9A7.5@73.785,20
DRV1_CUR: C71A7.1 DD1.30 R43A7.2 | length 44.4
  Top Layer w0.3: DD1.30@105.075,37 106.176,37 106.369,37.193 106.468,37.193 v1(106.525,37.25)
  Top Layer w0.5: C71A7.1@77.3,19.525 77.3,20.25 ; R43A7.2@77.3,20.975 77.3,20.25 ; v1(81.575,21.55) 81.575,21.523 80.302,20.25 77.3,20.25
  Power Layer w0.3: v1(81.575,21.55) 85.925,21.55 v1(88.6,24.225)
  Bottom Layer w0.3: v1(88.6,24.225) 89.45,25.075 102.406,25.075 104.535,27.204 104.535,35.96 105.768,37.193 106.468,37.193 v1(106.525,37.25)
DRV1_DIG_MOD: DD1.61 DD9A7.4 | length 46.9
  Top Layer w0.3: DD1.61@111.6,25.475 111.6,26.644 111.725,26.769 v1(111.725,26.85)
  Bottom Layer w0.3: DD9A7.4@72.515,20 72.515,18.397 73.427,17.485 99.024,17.485 106.578,25.04 110.64,25.04 111.7,26.1 111.7,26.825 v1(111.725,26.85)
DRV1_ERR1: DD1.56 DD10A7.7 | length 30.8
  Top Layer w0.3: v1(109.1,24.179) DD1.56@109.1,25.475
  Top Layer w0.5: DD10A7.7@83.625,19.975 83.638,19.962 83.638,18.437 v1(83.65,18.425)
  GND Layer w0.3: v1(83.65,18.425) 84.259,19.034 104.184,19.034 109.043,23.893 109.043,24.122 v1(109.1,24.179)
DRV1_ERR2: DD1.57 DD10A7.6 | length 30.5
  Top Layer w0.3: DD1.57@109.6,25.475 109.6,24.531 109.875,24.256 v1(109.875,24.175)
  Top Layer w0.5: DD10A7.6@84.925,19.975 84.938,19.962 84.938,18.437 v1(84.95,18.425)
  GND Layer w0.3: v1(84.95,18.425) 104.575,18.425 109.87,23.72 109.87,24.17 v1(109.875,24.175)
DRV1_ON: DD1.55 DD9A7.3 R37A7.2 | length 44.6
  Top Layer w0.3: v1(108.342,24.183) 108.342,24.264 108.6,24.521 DD1.55@108.6,25.475
  GND Layer w0.3: v1@71.268,18.418 72.403,19.553 103.678,19.553 108.308,24.183 v1(108.342,24.183)
  Bottom Layer w0.3: v1@71.248,18.402 v1(71.25,18.4)
  Bottom Layer w0.5: DD9A7.3@71.245,20 71.245,21.995 R37A7.2@71.35,22.1 ; v1@71.248,18.402 DD9A7.3@71.248,20
DRV2_AN_MOD: DD1.64 DD9A8.5 | length 76
  Top Layer w0.3: 113.1,24.456 DD1.64@113.1,25.475
  Power Layer w0.3: v1(44.071,18.4) 49.75,18.4 51.125,19.775 87.6,19.775 91.525,23.7 v1(96.2,23.7) ; v1(100.225,23.7) 102.86,21.065 108.075,21.065 110.381,23.372 112.072,23.372 v1(112.9,24.2)
  GND Layer w0.3: v1(96.2,23.7) v1(100.225,23.7)
  Bottom Layer w0.5: v1(44.071,18.4) DD9A8.5@44.07,20
DRV2_CUR: C71A8.1 DD1.31 R43A8.2 | length 73.7
  Top Layer w0.3: 47.625,20.175 47.7,20.25 ; DD1.31@105.075,36.5 v1(106.525,36.5)
  Top Layer w0.5: C71A8.1@47.625,19.525 47.625,20.175 R43A8.2@47.625,20.975 ; 47.7,20.25 v1(48.775,20.25)
  Power Layer w0.3: v1(48.775,20.25) 85.975,20.25 v1(89.275,23.55)
  Bottom Layer w0.3: v1(89.275,23.55) 90.225,24.5 102.771,24.5 105.241,26.97 105.241,35.672 106.067,36.498 106.523,36.498 v1(106.525,36.5)
DRV2_DIG_MOD: DD1.62 DD9A8.4 | length 75.7
  Top Layer w0.3: v1(112.025,24.2) 112.025,24.281 112.1,24.356 DD1.62@112.1,25.475
  Bottom Layer w0.3: DD9A8.4@42.8,20 42.8,18.375 44.242,16.933 99.616,16.933 105.893,23.21 111.085,23.21 v1@112.025,24.15
DRV2_ERR1: DD1.59 DD10A8.7 | length 64.1
  Top Layer w0.3: DD1.59@110.6,25.475 110.6,26.58 110.772,26.752 v1(110.772,26.833)
  Top Layer w0.5: v1(53.375,18.375) DD10A8.7@53.375,19.775
  GND Layer w0.3: v1(53.375,18.375) 55.486,20.486 103.004,20.486 107.976,25.458 110.058,25.458 110.715,26.115 110.715,26.776 v1(110.772,26.833)
DRV2_ERR2: DD1.60 DD10A8.6 | length 62.1
  Top Layer w0.3: v1(111.1,24.25) DD1.60@111.1,25.475
  Top Layer w0.5: v1(54.675,18.375) DD10A8.6@54.675,19.775
  GND Layer w0.3: v1(54.675,18.375) 56.336,20.036 103.348,20.036 108.271,24.959 110.391,24.959 v1(111.1,24.25)
DRV2_ON: DD1.58 DD9A8.3 R37A8.2 | length 77.1
  Top Layer w0.3: v1(109.95,26.85) 109.95,26.769 110.1,26.619 DD1.58@110.1,25.475
  GND Layer w0.3: v1(41.525,18.4) 42.27,19.146 52.671,19.146 54.461,20.936 102.661,20.936 107.702,25.977 109.077,25.977 v1(109.95,26.85)
  Bottom Layer w0.3: v1(41.525,18.4) v1@41.527,18.403
  Bottom Layer w0.5: v1@41.527,18.403 DD9A8.3@41.527,20 ; DD9A8.3@41.53,20 41.542,20.012 41.542,22.088 R37A8.2@41.555,22.1
EMIS_IND: DD1.2 R53.2 | length 36.2
  Top Layer w0.3: DD1.2@118.1,40.525 118.1,41.607 118.693,42.2 134.256,42.2 140.056,36.4 148.425,36.4 149.35,37.325 R53.2@150.2,37.325
ETH_CS: DD1.92 DD12.29 | length 47.3
  Top Layer w0.3: DD1.92@120.125,35 122.1,35 123.175,33.925 157.789,33.925 162.064,38.2 DD12.29@165.2,38.2
ETH_INT: DD1.88 DD12.47 | length 53.7
  Top Layer w0.3: DD1.88@120.125,33 121.25,33 122.85,31.4 170.89,31.4 171.5,32.01 DD12.47@171.5,33.4
ETH_MISO: DD1.90 DD12.33 | length 47.1
  Top Layer w0.3: DD1.90@120.125,34 121.761,34 123.143,32.618 159.168,32.618 162.25,35.7 163.605,35.7 164.105,36.2 DD12.33@165.2,36.2
ETH_MOSI: DD1.91 DD12.32 | length 47
  Top Layer w0.3: DD1.91@120.125,34.5 121.898,34.5 123.174,33.224 158.387,33.224 161.463,36.3 163.498,36.3 163.898,36.7 DD12.32@165.2,36.7
ETH_RST: DD1.93 DD12.48 R71.1 | length 62.9
  Top Layer w0.3: DD1.93@120.125,35.5 122.35,35.5 123.35,34.5 157,34.5 v1(160,37.5) ; v1(160,30.75) 171.92,30.75 172.02,30.85 172,30.87 DD12.48@172,33.4
  Bottom Layer w0.3: v1(160,30.75) v1(160,37.5)
ETH_SCLK: DD1.89 DD12.30 | length 51
  Top Layer w0.3: DD1.89@120.125,33.5 121.625,33.5 123.125,32 v1(162,32) ; v1(162,37) 162.7,37.7 DD12.30@165.2,37.7
  Bottom Layer w0.3: v1(162,32) v1(162,37)
EXT_AN_MOD: C109.1 DD1.32 R99.2 | length 69.9
  Top Layer w0.3: DD1.32@105.075,36 106.177,36 106.369,35.807 106.468,35.807 v1(106.525,35.75)
  Top Layer w0.5: C109.1@42.425,33.332 R99.2@42.425,34.782 42.429,34.779 43.396,34.779 v1(43.4,34.775)
  Power Layer w0.3: v1(43.4,34.775) 46.25,31.925 99.075,31.925 102.9,35.75 v1(106.525,35.75)
EXT_COM1: DD1.38 DD15.13 | length 86.2
  Top Layer w0.3: DD15.13@28.5,15.86 32.185,15.86 33.425,17.1 v1(33.425,18.8) ; v1(103.125,33.125) 103.206,33.125 103.331,33 DD1.38@105.075,33
  GND Layer w0.3: v1(33.425,18.8) 33.425,21.297 45.253,33.125 v1(103.125,33.125)
EXT_COM2: DD1.41 DD15.12 | length 90.5
  Top Layer w0.3: DD15.12@28.5,14.59 28.57,14.66 32.085,14.66 34.05,16.625 v1(34.05,18.125) ; DD1.41@105.075,31.5 106.025,31.5 v1(106.525,31)
  GND Layer w0.3: v1(34.05,18.125) 34.05,21.285 45.29,32.525 103.925,32.525 105.45,31 v1(106.525,31)
EXT_COM3: DD1.42 DD15.11 | length 87.6
  Top Layer w0.3: DD15.11@28.5,13.32 31.845,13.32 34.675,16.15 v1(34.675,18.8) ; v1(103.125,31.925) 104.05,31 DD1.42@105.075,31
  GND Layer w0.3: v1(34.675,18.8) 34.675,21.234 45.366,31.925 v1(103.125,31.925)
EXT_DIG_MOD: DD1.39 DD1.40 DD15.14 | length 89.2
  Top Layer w0.3: DD15.14@28.5,17.13 31.8,17.13 v1(32.795,18.125)
  Top Layer w0.5: 105.073,32.247 106.101,32.247 106.498,31.85 v1(106.525,31.85)
  GND Layer w0.3: v1(32.795,18.125) 32.8,18.13 32.8,21.308 45.292,33.8 103.775,33.8 105.668,31.907 106.468,31.907 v1(106.525,31.85)
EXT_FLAG1: DD1.43 R100.2 | length 87
  Top Layer w0.3: DD1.43@105.075,30.5 106.025,30.5 v1(106.525,30)
  GND Layer w0.3: v1(31.7,16.488) 34.67,16.488 49.507,31.325 103.842,31.325 105.167,30 v1(106.525,30)
  Bottom Layer w0.3: R100.2@30.075,19.2 30.867,19.2 31.7,18.367 v1(31.7,16.488)
EXT_FLAG2: DD1.44 R101.2 | length 82.4
  Top Layer w0.3: v1(103.125,30.725) 103.85,30 DD1.44@105.075,30
  GND Layer w0.3: v1(31.7,15.26) 31.728,15.288 34.107,15.288 49.544,30.725 v1(103.125,30.725)
  Bottom Layer w0.3: R101.2@30.075,16.7 30.075,16.65 30.35,16.375 30.617,16.375 31.7,15.292 v1(31.7,15.26)
EXT_FLAG3: DD1.45 R102.2 | length 85.2
  Top Layer w0.3: DD1.45@105.075,29.5 105.964,29.5 106.464,29 v1(106.525,29)
  GND Layer w0.3: v1(31.7,14.06) 31.728,14.088 33.543,14.088 49.555,30.1 103.794,30.1 104.894,29 v1(106.525,29)
  Bottom Layer w0.3: R102.2@30.075,14.1 30.115,14.06 v1(31.7,14.06)
EXT_FLAG4: DD1.46 R103.2 | length 82.6
  Top Layer w0.3: v1(103.125,29.5) 103.625,29 DD1.46@105.075,29
  GND Layer w0.3: v1(31.7,11.6) 31.752,11.6 49.652,29.5 v1(103.125,29.5)
  Bottom Layer w0.3: R103.2@30.075,11.6 v1(31.7,11.6)
EXT_IL1: DD1.33 R91.2 U6.16 | length 92.4
  Top Layer w0.3: DD1.33@105.075,35.5 105.926,35.5 106.488,34.938 v1@106.535,34.938
  Top Layer w0.5: U6.16@26.92,54 R91.2@28.95,54 28.975,53.975 28.975,53.025 v1(29,53)
  GND Layer w0.3: v1(29,53) 32.95,49.05 32.95,44.525 38.35,39.125 100.05,39.125 102.775,36.4 104.642,36.4 106.084,34.958 106.516,34.958 v1@106.535,34.938
  other v1: 106.525,34.938
EXT_IL2: DD1.34 R92.2 U6.14 | length 87.4
  Top Layer w0.3: v1(101.475,36.775) 102.1,36.775 103.875,35 DD1.34@105.075,35
  Top Layer w0.5: U6.14@26.9,51.48 R92.2@28.93,51.48 ; R92.2@28.95,51.5 28.975,51.475 28.975,50.525 v1(29,50.5)
  GND Layer w0.3: v1(29,50.5) 32.225,47.275 32.225,44.175 37.725,38.675 99.575,38.675 v1(101.475,36.775)
EXT_KEY: DD1.35 R94.2 U6.12 | length 88.9
  Top Layer w0.3: DD1.35@105.075,34.5 106.044,34.5 106.444,34.1 v1(106.525,34.1)
  Top Layer w0.5: U6.12@26.9,48.94 28.91,48.94 R94.2@28.95,48.9 ; R94.2@28.95,48.94 28.975,48.915 28.975,47.965 v1(29,47.94)
  GND Layer w0.3: v1(29,47.94) 31.45,45.49 31.45,43.95 37.175,38.225 98.925,38.225 101.35,35.8 104.141,35.8 105.841,34.1 v1(106.525,34.1)
EXT_MP_EN: DD1.36 R96.2 U6.10 | length 83.9
  Top Layer w0.3: v1(103.125,34.475) 103.6,34 DD1.36@105.075,34
  Top Layer w0.5: U6.10@26.9,46.4 R96.2@28.95,46.4 28.975,46.375 28.975,45.425 v1(29,45.4)
  GND Layer w0.3: v1(29,45.4) 36.625,37.775 98.4,37.775 101.75,34.425 103.075,34.425 v1(103.125,34.475)
EXT_PMO: DD1.53 DD16.2 | length 77.1
  Top Layer w0.5: DD16.2@26.8,23.2 v1(28.15,23.2)
  GND Layer w0.3: v1(28.15,23.2) 34.055,23.2 45.38,34.525 v1(99.2,34.525)
FIBER_IL: DD1.82 DD11.4 | length 27.2
  Top Layer w0.3: DD11.4@111.15,10.95 111.15,11.275 111.275,11.4 112.1,11.4 v1(115.175,14.475) ; DD1.82@120.125,30 120.974,30 121.468,30.493 121.468,31.093 v1(121.525,31.15)
  Power Layer w0.3: v1(115.175,14.475) 121,20.3 121,30.625 v1(121.525,31.15)
FLAG1_HW: R116.2 U7.15 XP9.19 | length 18.5
  Bottom Layer w0.3: XP9.19@3.6,20.5 5.05,19.05 18.55,19.05 18.875,18.725 R116.2@18.875,17.94 U7.15@20.6,17.94
FLAG2_HW: R117.2 U7.13 XP9.22 | length 20.4
  Bottom Layer w0.3: XP9.22@1.6,18.5 2.6,17.5 4.6,17.5 5.682,16.418 18.128,16.418 18.6,15.946 18.6,15.675 R117.2@18.875,15.4 U7.13@20.6,15.4
FLAG3_HW: R119.2 U7.11 XP9.23 | length 19
  Bottom Layer w0.3: XP9.23@3.6,16.5 5.996,14.104 18.396,14.104 18.875,13.625 R119.2@18.875,12.86 U7.11@20.6,12.86 ; U7.11@20.585,13.02 U7.11@20.625,12.98
FLAG4_HW: R120.2 U7.9 XP9.24 | length 21.8
  Bottom Layer w0.3: XP9.24@1.6,16.5 6.9,11.2 18.467,11.2 18.643,11.024 18.643,10.552 R120.2@18.875,10.32 U7.9@20.6,10.32
FLOW: DD1.77 DD17.6 | length 55.8
  Top Layer w0.3: DD1.77@120.125,27.5 121.25,27.5 121.693,27.057 121.693,26.757 v1(121.75,26.7)
  Top Layer w0.5: v1(169.525,16.725) 169.532,16.718 169.532,15.407 DD17.6@169.539,15.4
  GND Layer w0.3: v1(147.475,25.325) 147.95,25.8 153.225,25.8 155.875,23.15 163.1,23.15 v1(169.525,16.725)
  Bottom Layer w0.3: v1(121.75,26.7) 123.07,25.38 147.42,25.38 v1(147.475,25.325)
GND: C2.2 C4.1 C5.2 C6.2 C8.2 C9.2 C11.2 C13.1 C14.1 C15.1 C16.2 C19.2 C20.2 C21.2 C22.2 C23.2 C24.2 C25.2 C26.2 C27.2 C38.2 C42.2 C43.2 C56A7.2 C56A8.2 C68A7.2 C68A8.2 C72.2 C73.2 C74.2 C76.2 C77.2 C78.2 C79.2 C80.2 C81.2 C82.2 C83.2 C84.2 C85.2 C86.2 C87.2 C88.2 C89.2 C90.2 C91.2 C92.2 C93.2 C94.2 C105.2 C106.2 C108.2 C123.2 DA1.7 DA2.1 DA3.2 DA3.9 DA13.5 DA14.5 DA15.2 DD1.10 DD1.27 DD1.74 DD1.99 DD2.4 DD3.4 DD5.9 DD5.15 DD6.2 DD6.3 DD6.8 DD9A7.2 DD9A7.6 DD9A7.8 DD9A8.2 DD9A8.6 DD9A8.8 DD10A7.5 DD10A8.5 DD11.3 DD12.1 DD12.7 DD12.10 DD12.16 DD12.23 DD12.25 DD12.26 DD12.27 DD12.28 DD12.46 DD14.4 DD15.9 DD15.15 DD16.4 DD17.5 DD17.7 GB1.1 R1.1 R2.1 R4.1 R5.1 R6.2 R7.2 R37A7.1 R37A8.1 R44.1 R47.2 R50.1 R51.1 R67.1 U2.2 U3.2 U4.2 U6.9 U6.11 U6.13 U6.15 U7.2 U7.4 U7.6 U7.8 VD1.2 VD2.2 VD3.2 XP3.3 XP8.2 ZQ2.2 ZQ2.4 ZQ3.2 ZQ3.4 | length 116.7
  Top Layer w0.3: DD15.15@28.5,18.4 30.45,18.4 C106.2@30.6,18.25 30.757,18.407 31.349,18.407 31.742,18.8 ; C68A7.2@85.025,22.175 C68A7.2@85.038,22.188 ; DD1.27@105.075,38.5 106.176,38.5 106.552,38.876 106.552,39.124 105.776,39.9 ; XP8.2@110.2,2.3 C76.2@110.2,5.5 ; DD1.10@114.1,40.525 114.1,39.374 114.425,39.049 ; ZQ2.2@114.8,49.275 114.85,49.325 C24.2@114.85,50.875 ; v1(115.353,44.653) 115.949,45.249 115.949,45.33 116.125,45.506 116.125,46.1 C26.2@116.4,46.375 116.4,47.875 ZQ2.4@116.5,47.975 ; 117.565,27.308 117.775,27.099 117.775,26.876 118.1,26.551 DD1.74@118.1,25.475 118.1,24.247 118.276,24.071 118.916,24.071 ; 118.587,37.912 119.175,38.5 DD1.99@120.125,38.5 ; C23.2@119.5,48.025 119.5,48.625 ; C25.2@119.5,49.375 119.5,48.625 ; 120.545,17.013 DA13.5@121.637,17.013 ; C72.2@120.55,20.375 R44.1@120.55,21.825 ; 120.65,48.625 119.5,48.625 ; 163.9,38.7 DD12.28@165.2,38.7 DD12.27@165.2,39.2 DD12.26@165.2,39.7 DD12.25@165.2,40.2 ; ZQ3.4@170.975,46.7 171.425,47.15 171.425,47.375 172.225,48.175 172.225,48.45 172.525,48.75 C84.2@174.375,48.75 175.937,48.75 R67.1@175.975,48.712 ; 171.5,34.7 DD12.1@173.3,34.7 ; 171.9,39.2 DD12.10@173.3,39.2 ; C86.2@172.6,50.7 172.6,48.975 ZQ3.2@172.675,48.9
  Top Layer w0.5: DD16.4@26.8,25.75 28.075,25.75 28.15,25.825 28.625,25.825 C108.2@28.8,26 ; v1(54.775,23.075) C68A8.2@54.775,22.175 54.775,22.125 54.95,21.95 55.3,21.95 55.925,21.325 DD10A8.5@55.925,19.85 ; C68A7.2@85.025,22.175 85.025,22.125 85.2,21.95 85.487,21.95 85.493,21.945 85.55,21.945 86.175,21.319 DD10A7.5@86.175,19.85 ; v1(85.025,23.05) 85.025,22.2 C68A7.2@85.038,22.188 ; R2.1@91.275,41.65 91.475,41.45 92.95,41.45 ; VD1.2@108.025,51.1 VD2.2@109.935,51.1 VD3.2@111.85,51.1 ; C73.2@125.837,17.238 125.837,16.19 126.1,15.927 v1(126.1,15.9) ; DD5.9@142.396,20.01 142.446,20.06 142.446,21.288 142.506,21.348 142.506,21.9 C43.2@142.681,22.075 ; C8.2@166.875,26.95 167.007,27.082 167.007,27.632 167.3,27.925 DA2.1@168.8,27.925 ; DD17.7@168.239,15.4 168.239,17.464 C123.2@168.4,17.625
  Top Layer w0.6: v1(36.225,19.425) 37.25,18.4 v1(40.25,18.4) ; 175.15,17.125 175.15,17.8 ; C9.2@175.15,18.475 175.15,17.8 ; 176.825,17.8 175.15,17.8
  Power Layer w0.6: v1(36.225,19.425) 37.25,18.4 v1(40.25,18.4)
  Bottom Layer w0.3: 25.64,12.8 25.64,10.66 25.976,10.324 U7.8@26.816,10.324 ; DD6.2@134.776,20.01 DD6.2@134.776,20 134.776,18.376 134.952,18.2 136.046,18.2 ; DD6.3@136.046,20.01 DD6.3@136.046,20 136.046,18.2 ; DD6.8@142.396,20.01 DD6.8@142.396,20 142.396,18.376 142.221,18.2 136.046,18.2 ; DA15.2@184.3,27.225 184.312,27.212 185.588,27.212 v1(185.6,27.2)
  Bottom Layer w0.5: DD9A8.2@40.26,20 40.26,21.935 C56A8.2@40.425,22.1 ; DD9A7.2@69.975,20 69.975,21.875 70.2,22.1 C56A7.2@70.225,22.1 ; 114.734,38.74 115,38.474 115,38.075 C13.1@115.175,37.9 C20.2@117.025,37.9 ; DD6.8@142.396,20.01 142.446,20.06 142.446,21.291 142.506,21.351 142.506,21.9 C42.2@142.681,22.075
  Bottom Layer w1: 176.961,21.389 181.01,17.34 DA1.7@185.25,17.34 ; DA1.7@185.25,17.35 187.1,17.35 C2.2@187.225,17.475
  other v1: 104.7,0.4 106.4,0.4 108.1,0.4 109.8,0.4 112.3,0.4 115.2,0.4 118.2,0.4 125.2,0.5 127.7,0.5 116.7,1.6 104.7,3 112.4,3 115.2,3 118.2,3 125.2,3.2 127.7,3.2 106.4,4.5 113.8,4.5 116.7,4.5 104.7,5.9 112.4,5.9 115.2,5.9 127.7,6.1 106.4,7.3 113.8,7.3 104.7,8.75 112.4,8.75 115.2,8.75 127.7,8.75 30.575,9.9 104.6,10.75 106.5,10.75 102.675,10.775 112.9,10.825 115.9,10.825 118.1,10.825 127.7,10.825 99.7,13.8 102.2,13.8 104.6,13.8 106.6,13.8 108.8,13.8 112.9,13.8 115.9,13.8 118.1,13.8 120.1,13.8 127.7,13.8 164.175,14.225 172.05,14.475 126.1,15.025 129.4,15.5 97.3,16.083 99.7,16.083 102.2,16.083 172.05,16.075 104.6,16.2 106.5,16.2 108.8,16.2 112.9,16.2 118.1,16.2 127.7,16.2 164.175,16.375 131.025,17 170.575,17.5 106.5,17.95 108.8,18 119.9,18.075 69.975,18.4 132.681,18.5 154.7,18.6 160.725,18.6 164.175,18.6 144.05,18.85 146.05,18.85 59.375,18.95 61.675,18.95 63.7,18.95 65.75,18.95 168.7,19.4 171.9,19.7 119.2,19.8 26,20.9 27.575,20.9 29.05,20.9 31.65,20.9 170.6,21.025 171.9,21.025 119.2,21.25 59.375,21.925 61.675,21.925 63.7,21.925 65.75,21.925 144.05,22.075 171.9,22.325 29.05,22.4 31.675,22.4 165.45,22.625 37.818,22.872 121.825,22.9 126.15,22.9 175.075,23.025 176.725,23.025 178.525,23.025 180.25,23.025 183.7,23.025 187.15,23.025 190.6,23.025 31.7,24.35 59.375,24.425 61.675,24.425 63.7,24.425 65.75,24.425 104.325,24.55 85.025,24.675 177.65,24.75 179.475,24.75 181.4,24.75 105.3,25.475 30.175,26 126.6,26.325 176.725,26.45 178.525,26.45 160.6,27 162.3,27 164,27 126.6,27.15 146.575,27.358 170.65,27.925 171.775,27.925 172.925,27.925 26.1,28 177.65,28.125 112.475,28.325 137,28.675 144.65,28.675 147.85,28.675 111.175,29.262 114.812,29.262 116.2,29.262 117.625,29.262 26.1,29.5 160.6,29.7 162.3,29.7 165.325,29.7 167.025,29.7 168.725,29.7 170.4,29.7 142.8,30.55 146,30.55 152,30.55 109.225,30.7 26.1,31 114.65,31.7 177.3,31.7 174.9,31.8 164.7,32 166.5,32 26.1,32.5 28.45,32.5 30.75,32.5 165.5,32.7 173.6,32.9 175.8,32.9 113.325,32.975 115.975,32.975 109.2,33.125 111.2,33.125 26.1,34 114.65,34.3 109.2,34.875 111.2,34.875 182.5,35.2 113.325,35.475 115.975,35.475 26.1,35.5 167.3,35.6 169.1,35.6 170.8,35.6 31.625,36.2 93.25,36.475 91.5,36.5 95.95,36.5 97.75,36.5 177.6,36.6 126.425,36.7 128.725,36.7 131.025,36.7 133.325,36.7 136.2,36.7 182.5,36.7 26.1,37 167.3,37.3 169.1,37.3 170.8,37.3 31.625,37.5 143.45,37.85 145.3,37.85 177.6,38.3 26.1,38.5 182.5,38.7 189.1,38.7 123.925,39 125.725,39 127.725,39 129.925,39 132.025,39 134.7,39 167.3,39 169.1,39 170.8,39 95.825,39.975 97.025,40 98.2,40 31.625,40.125 141.375,40.15 143.45,40.15 145.525,40.15 182.5,40.3 189.1,40.5 160,41 163,41 138.85,42.45 141.375,42.45 187,42.5 189.1,42.5 182.5,43.3 94.85,43.65 97.15,43.65 100.95,43.65 102.375,43.65 103.825,43.65 28.5,43.805 160,44 163,44 184.6,44.2 187,44.2 136.325,44.75 138.85,44.75 141.375,44.75 182.5,46.1 184.6,46.1 187,46.1 160,47 163,47 166,47 133.8,47.05 94.95,47.525 94.95,49.075 131.275,49.35 133.8,49.35 136.325,49.35 138.85,49.35 141.375,49.35 160,50 163,50 166,50 183,50 186,50 174.4,50.7 91.725,50.825 123.425,52.4 126.25,52.4 91.725,52.425 94.025,52.425 128.725,52.425 131.2,52.425 133.8,52.425 136.325,52.425 138.85,52.425 141.375,52.425 160,53 163,53 166,53 180,53 183,53 186,53 108.275,53.5 110.65,53.5 113.3,53.5 115.675,53.5 118.325,53.5 121.175,53.5 91.7,54 93.975,54
  other v4: 204.65,13.825 205.75,13.825
GND_24V: C1.2 C39.2 C51A7.2 C51A8.2 C110.2 C119.2 DA1.1 DA6.1 DA9A7.1 DA9A8.1 DA17.1 DA20.1 U2.3 U3.3 U4.3 XP2.2 | length 309.6
  Top Layer w0.5: U4.3@148.175,47.275 v1(148.175,48.675) ; U3.3@151.475,47.275 v1(151.475,48.675) ; U2.3@154.775,47.275 v1(154.775,48.675)
  Top Layer w1: DA20.1@175.975,9.695 188.05,9.695 ; DA1.1@185.25,2.12 185.38,2.25 186.437,2.25 188.05,3.863 188.05,9.695 ; XP2.2@197.4,15.425 197.4,13.275 193.82,9.695 188.05,9.695
  GND Layer w0.8: v1(148.175,48.675) v1(151.475,48.675) v1(154.775,48.675) 155.875,47.575 155.875,28.2 v3(156.775,27.3)
  GND Layer w1: DA17.1@31.38,2.6 34.675,5.895 34.675,12.333 38.417,16.075 59.55,16.075 ; DA9A8.1@59.55,9.695 59.55,16.075 ; DA9A7.1@89.675,9.705 89.675,16.075 ; v3(156.775,19.025) 156.781,19.019 156.781,16.575 ; DA6.1@156.781,9.7 156.781,16.575 ; XP2.2@197.4,15.425 191.67,9.695 183.772,9.695 181.067,12.4 162.998,12.4 158.823,16.575 156.781,16.575 ; 59.55,16.075 89.675,16.075 ; 89.675,16.075 94.675,16.075 98.376,12.374 128.939,12.374 133.14,16.575 156.781,16.575
  Bottom Layer w0.3: C110.2@31.38,5.58 C110.2@31.8,6
  Bottom Layer w0.8: v3(156.775,19.025) v3(156.775,27.3)
  Bottom Layer w1: DA17.1@31.38,2.6 C110.2@31.38,5.58 ; DA9A8.1@59.55,9.695 61.264,11.409 62.325,11.409 62.925,12.009 C51A8.2@62.925,12.15 ; DA9A7.1@89.675,9.705 91.389,11.419 92.475,11.419 93.075,12.019 C51A7.2@93.075,12.15 ; DA6.1@156.781,9.7 156.781,11.781 158.225,13.225 C39.2@160.35,13.225 ; DA20.1@175.975,9.695 175.975,11.7 177.5,13.225 C119.2@179.525,13.225 ; DA1.1@185.25,2.1 187.65,2.1 C1.2@188.05,1.7
GND_DRVA7: C52A7.2 C53A7.2 C54A7.2 C55A7.1 C57A7.2 C58A7.2 C59A7.2 C62A7.1 C63A7.2 C64A7.2 C66A7.2 C67A7.2 C70A7.2 DA9A7.3 DA10A7.2 DA12A7.5 DD7A7.3 DD8A7.3 DD9A7.9 DD9A7.15 DD10A7.4 R31A7.1 R32A7.1 R36A7.2 U1A7.3 U1A7.4 XP5A7.2 | length 20
  Top Layer w0.5: C54A7.2@68.625,6.925 C55A7.1@70.075,6.925 R36A7.2@71.525,6.925 ; U1A7.3@71.25,10.925 U1A7.4@72.525,10.925 ; C52A7.2@77.325,6 77.35,6.025 78.9,6.025 R31A7.1@78.925,6.05 ; C53A7.2@83,6 83.025,6.025 84.6,6.025 R32A7.1@84.625,6.05
  Top Layer w1: 87.361,4.625 DA9A7.3@89.675,4.625
  Bottom Layer w0.5: v1(69.645,2.003) 69.66,2.019 DA10A7.2@69.66,5.025 ; DA10A7.2@69.65,5.025 69.65,5.1 C67A7.2@69.65,6.65 ; C67A7.2@69.675,6.675 69.769,6.769 69.769,7.542 69.95,7.722 69.95,8.25 C64A7.2@70.125,8.425 ; DD9A7.15@69.975,10.4 70.025,10.35 70.025,8.5 C64A7.2@70.1,8.425 ; C66A7.2@87.275,12.575 87.275,12.525 87.45,12.35 87.5,12.35 87.875,11.975 87.875,11.175
  other v1: 68.5,0.7 71.075,0.7 73.3,0.7 83.975,1.2 67.15,2.05 67.15,3.95 67.15,5.775 79.7,10.5 68.25,13.3 70.425,13.3 72.575,13.3